# EAGLE board aurdino 6 (EAGLE 9.7.0)

Size 151.17 x 109.97 mm. Coordinates in mm from the lower left corner, seen from the top.
Outline: 0,0 151.17,0 151.17,109.97 0,109.97 0,0
Copper layers (1*16): Top 0.035mm / dielectric 1.5mm / Bottom 0.035mm
Design rules "default": minimum track width 6mil, minimum drill 0.35mm, track to track 6mil, track to pad 6mil, pad to pad 6mil, via to via 6mil, smd to smd 6mil, copper to edge 40mil, drill to drill 6mil, minimum pad ring 10mil, minimum via ring 8mil, stop-mask expansion 4mil, vias tented up to drill 0mil, thermal gap 10mil

## Footprints (pad centres in the part's own frame; a part is rotated, then mirrored left to right if it is on the bottom)
BATTERY-GENERIC = drill 1.118 pad 3.15 octagon: + 2.54,0; - -2.54,0
LEDRD254W60D565H860B = drill 0.981 pad 1.581: 1 -1.27,0; 2 1.27,0
LEDRD254W60D565H860B_Y = drill 0.981 pad 1.581: 1 -1.27,0; 2 1.27,0
LEDRD254W60D565H860B_G = drill 0.981 pad 1.581: 1 -1.27,0; 2 1.27,0
RESAD1016W63L850D250B = drill 0.83 pad 1.43: 1 -5.08,0; 2 5.08,0
SWITCH-MOMENTARY-PTH-6.5MM = drill 1.016 pad 1.88: 1 -3.251,2.261; 2 3.251,2.261; 3 -3.251,-2.261; 4 3.251,-2.261
SWITCH-SPDT-PTH-8.5X3.7MM = drill 1.016 pad 1.88: 1 -2.54,0; 2 0,0; 3 2.54,0
TO92 = drill 0.813 octagon: 1 -1.27,0; 2 0,1.905; 3 1.27,0
ARDUINO-UNO-R3-SHIELD = drill 1.016 pad 1.88: 3.3V 24.13,-2.54; 5V 24.13,0; A0 24.13,12.7; A1 24.13,15.24; A2 24.13,17.78; A3 24.13,20.32; A4 24.13,22.86; A5 24.13,25.4; AREF -24.13,-13.97; D2 -24.13,20.32; D3 -24.13,17.78; D4 -24.13,15.24; D5 -24.13,12.7; D6 -24.13,10.16; D7 -24.13,7.62; D8 -24.13,3.81; D9 -24.13,1.27; D10 -24.13,-1.27; D11 -24.13,-3.81; D12 -24.13,-6.35; D13 -24.13,-8.89; GND@0 24.13,2.54; GND@1 24.13,5.08; GND@2 -24.13,-11.43; IOREF 24.13,-7.62; NC 24.13,-10.16; RES 24.13,-5.08; RX -24.13,25.4; SCL -24.13,-19.05; SDA -24.13,-16.51; TX -24.13,22.86; VIN 24.13,7.62

## Placement (x,y rotation side)
BAT1  6V  [BATTERY-GENERIC]  112.98,8.26 0 top
D1  RED  [LEDRD254W60D565H860B]  104.61,91.56 180 top
D2  YELLOW  [LEDRD254W60D565H860B_Y]  124.4,91.34 180 top
D3  GREEN  [LEDRD254W60D565H860B_G]  143.57,92.27 180 top
R1  1k  [RESAD1016W63L850D250B]  96.01,85.07 90 top
R2  320  [RESAD1016W63L850D250B]  105.88,86.48 90 top
R3  1k  [RESAD1016W63L850D250B]  115.75,84.13 90 top
R4  320  [RESAD1016W63L850D250B]  125.67,86.26 90 top
R5  1k  [RESAD1016W63L850D250B]  134.91,85.05 90 top
R6  320  [RESAD1016W63L850D250B]  144.84,87.19 90 top
R7  1k  [RESAD1016W63L850D250B]  29.7,101 90 top
S1  SWITCH_MOMENTARY  [SWITCH-MOMENTARY-PTH-6.5MM]  27.16,92.11 90 top
S3  TOGGLE  [SWITCH-SPDT-PTH-8.5X3.7MM]  35.45,87.47 0 top
S4  TOGGLE  [SWITCH-SPDT-PTH-8.5X3.7MM]  43.79,87.57 0 top
S5  TOGGLE  [SWITCH-SPDT-PTH-8.5X3.7MM]  52.05,87.57 0 top
T1  NPN  [TO92]  115.75,89.21 0 top
T2  NPN  [TO92]  134.91,90.13 0 top
T4  NPN  [TO92]  96.01,90.15 0 top
U1  ARDUINO-UNO-R3-SHIELD  [ARDUINO-UNO-R3-SHIELD]  47.88,40.04 270 top

## Library data of the parts
BAT1 R1-R7 S1 S3-S5 U1 = Tinkercad
D1 = Tinkercad; CATEGORY: Opto-Electronic; SUB-CATEGORY: LED; VALUE: LED_RED
D2 = Tinkercad; CATEGORY: Opto-Electronic; SUB-CATEGORY: LED; VALUE: LED_YELLOW
D3 = Tinkercad; CATEGORY: Opto-Electronic; SUB-CATEGORY: LED; VALUE: LED_GREEN
T1 T2 T4 = Tinkercad; CATEGORY: Transistor; SUB-CATEGORY: BJT; TYPE: NPN

## Nets
BAT1+: BAT1.+ R2.1 R4.1 R6.1
BAT1-: BAT1.- R7.2 S3.1 S4.1 S5.1 T1.1 T2.1 T4.1 U1.GND@0 U1.GND@1 U1.GND@2
D1_A: D1.1 R2.2
D1_C: D1.2 T4.3
D2_A: D2.1 R4.2
D2_C: D2.2 T1.3
D3_A: D3.1 R6.2
D3_C: D3.2 T2.3
T1_B: R3.2 T1.2
T2_B: R5.2 T2.2
T4_B: R1.2 T4.2
U1_5V: S1.1 S3.3 S4.3 S5.3 U1.5V
U1_D3: R5.1 U1.D3
U1_D4: R3.1 U1.D4
U1_D5: R1.1 U1.D5
U1_D8: S5.2 U1.D8
U1_D9: S4.2 U1.D9
U1_D10: S3.2 U1.D10
U1_D11: R7.1 S1.3 S1.4 U1.D11

## Tracks (layer width: path | path; a pad name or v marks a point on that pad's centre or on a via)
BAT1+  (3 unrouted)
BAT1-  (10 unrouted)
D1_A  (1 unrouted)
D1_C  (1 unrouted)
D2_A  (1 unrouted)
D2_C  (1 unrouted)
D3_A  (1 unrouted)
D3_C  (1 unrouted)
T1_B  (1 unrouted)
T2_B  (1 unrouted)
T4_B  (1 unrouted)
U1_5V  (4 unrouted)
U1_D3  (1 unrouted)
U1_D4  (1 unrouted)
U1_D5  (1 unrouted)
U1_D8  (1 unrouted)
U1_D9  (1 unrouted)
U1_D10  (1 unrouted)
U1_D11  (3 unrouted)